# Altium PCB FE.PcbDoc
Units mm, origin at the board's own origin, x right, y up, seen from the top; angles counter-clockwise.
Board outline 43.2 x 52 mm, 4 copper layers (Layer 1, Layer 2, Layer 3, Layer 4), stack 1.641 mm thick; 117 components, 63 nets, 345 pads, 186 vias.
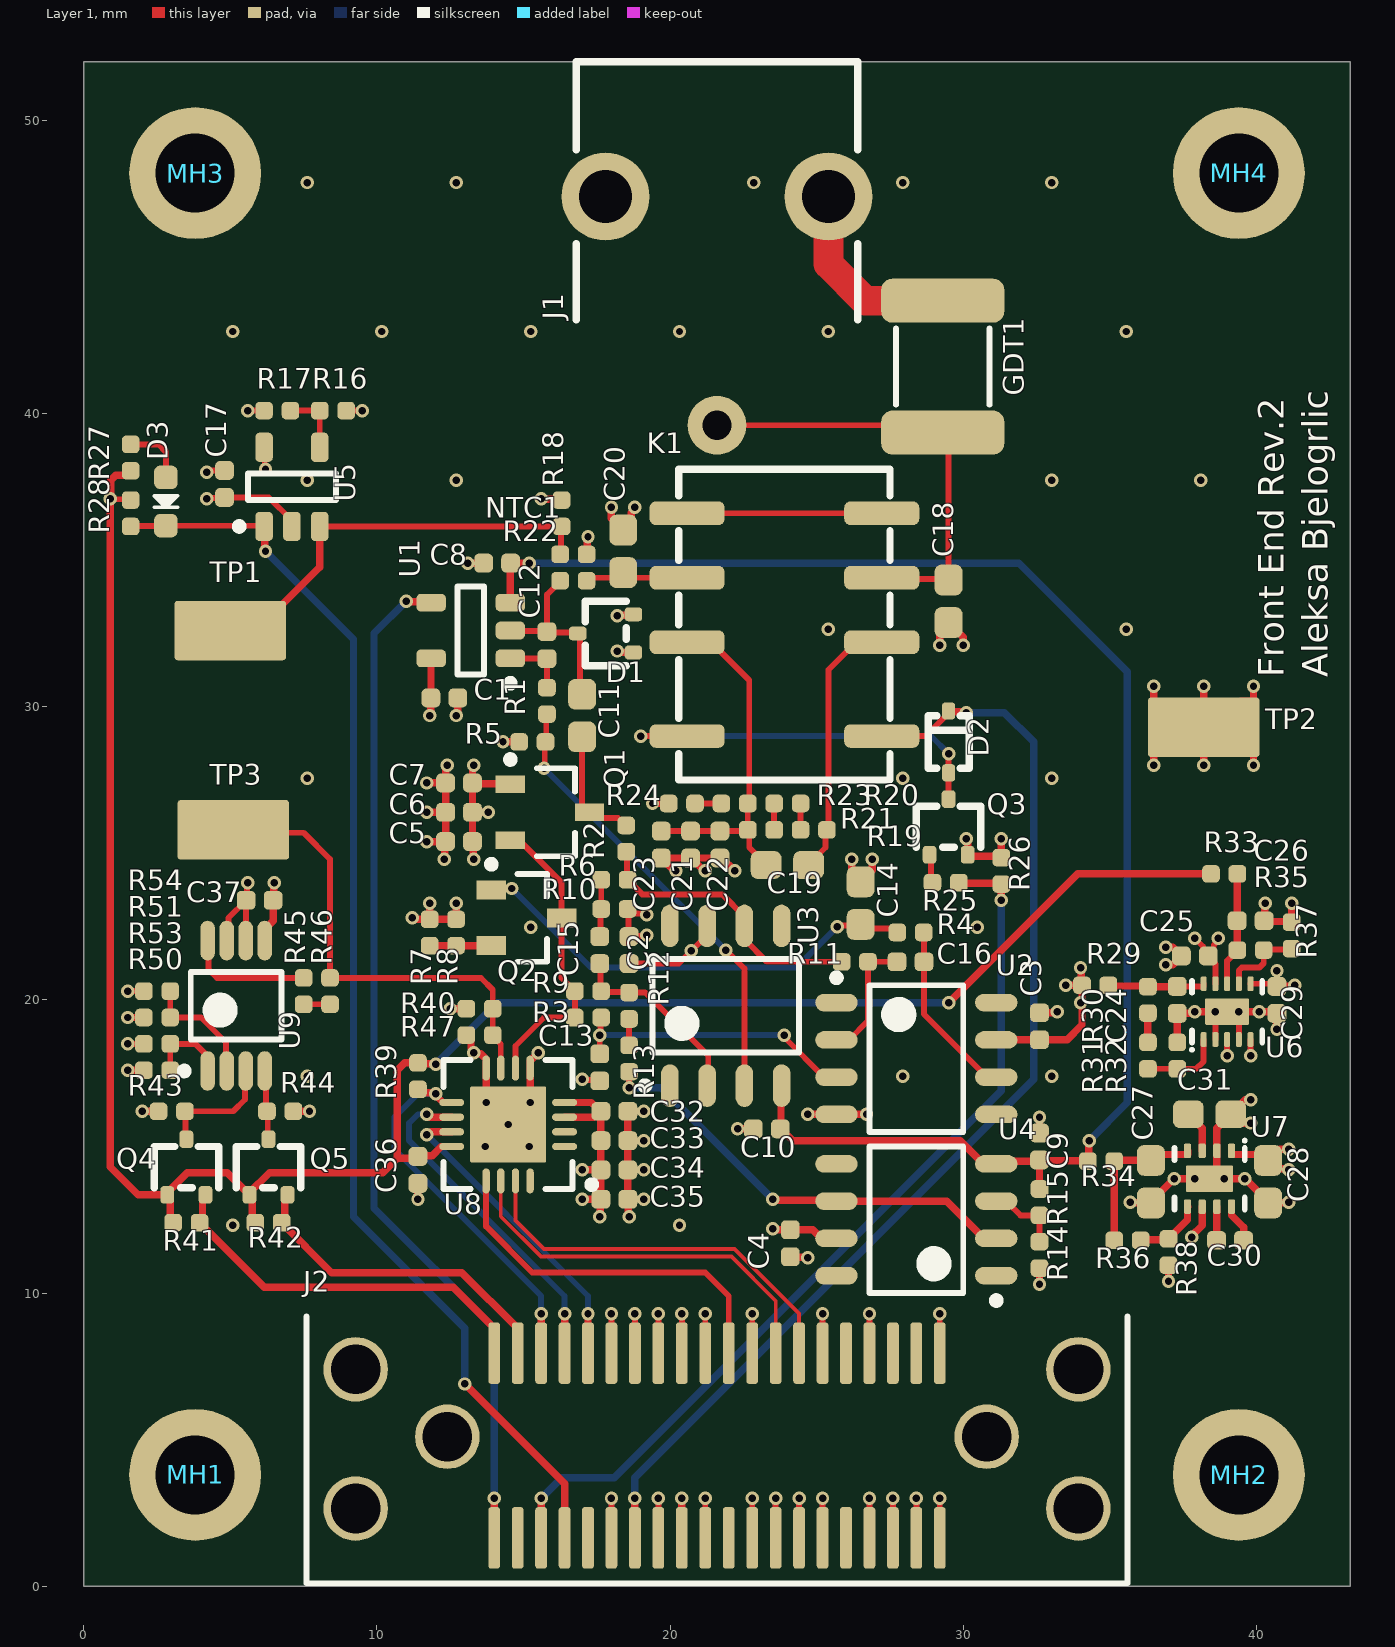
[diagram p0: Layer 1 view]
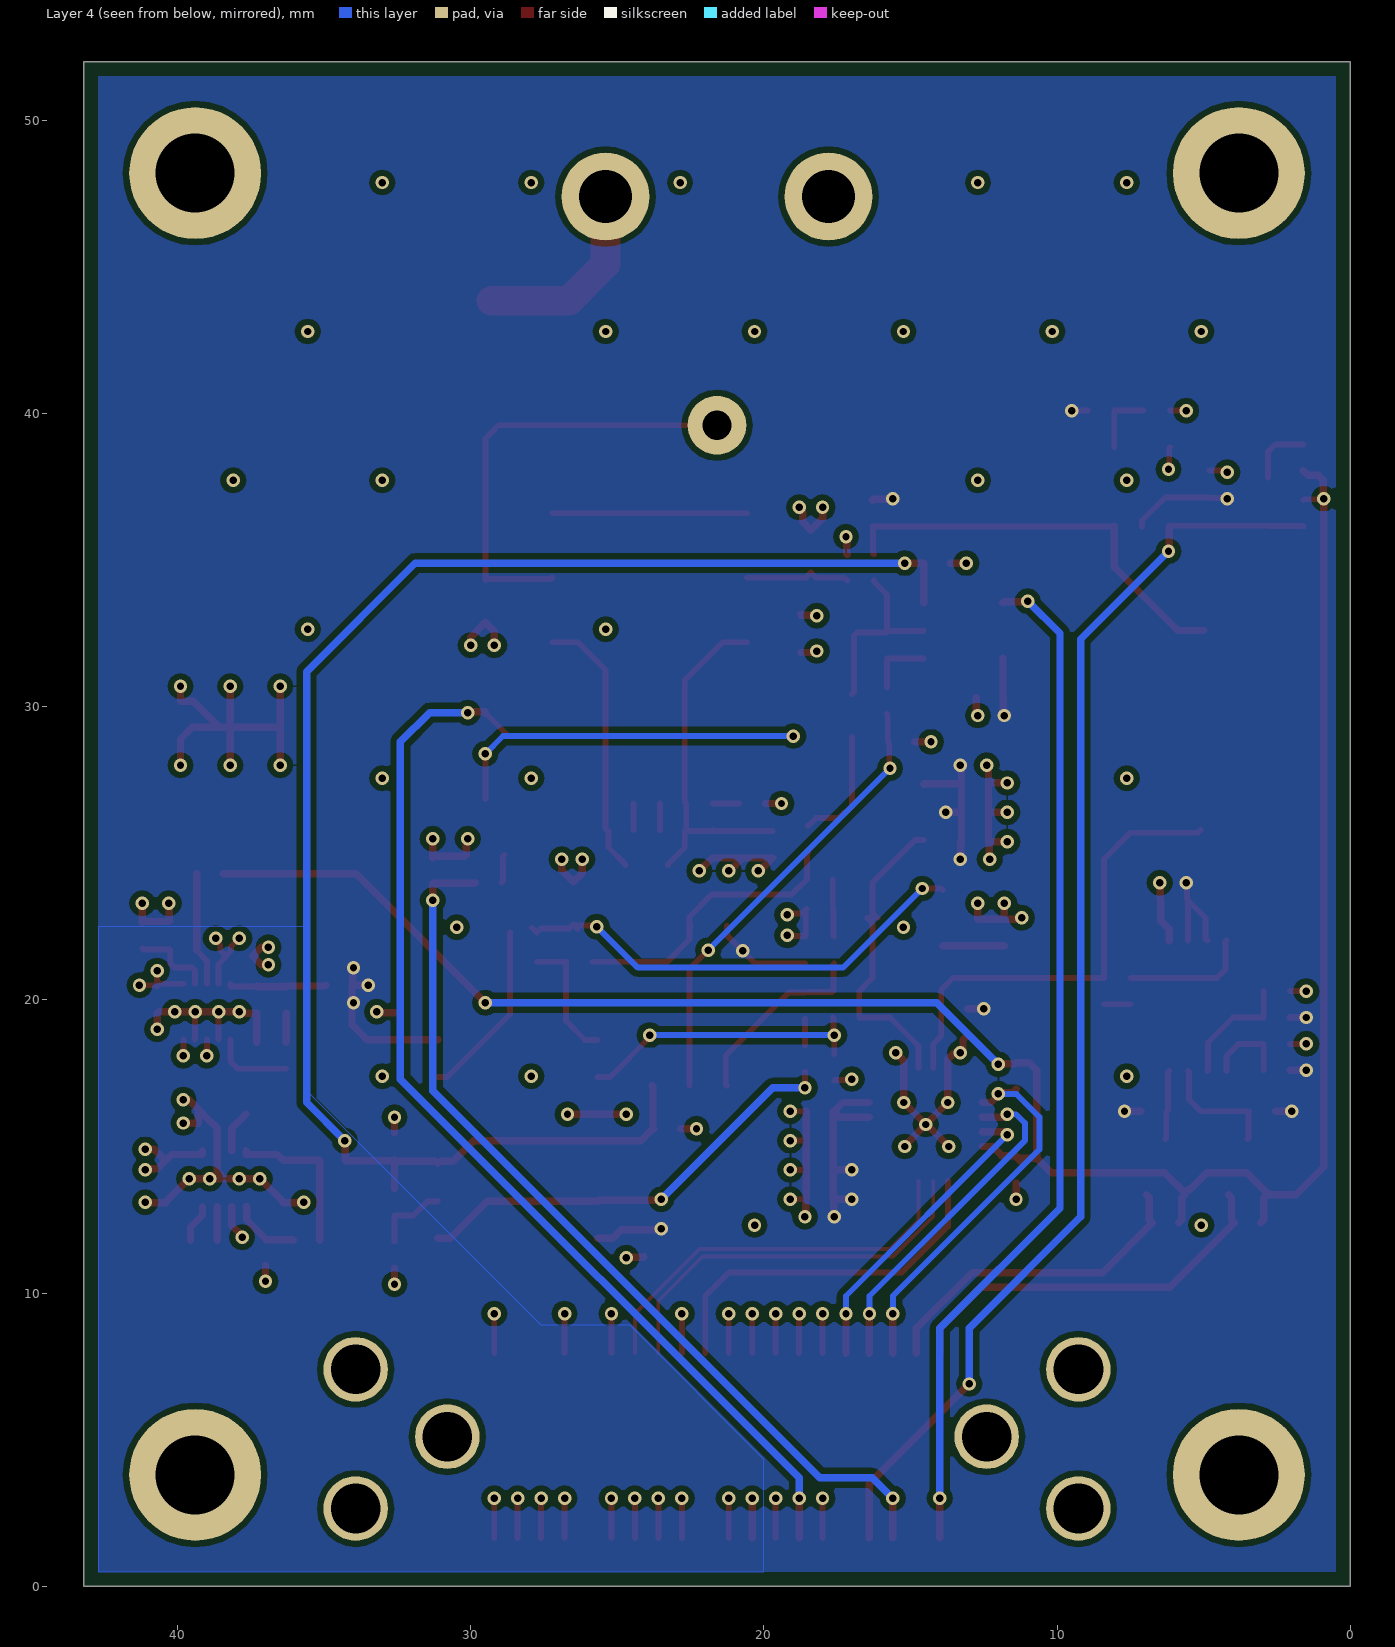
[diagram p1: Layer 4 view, seen from below]
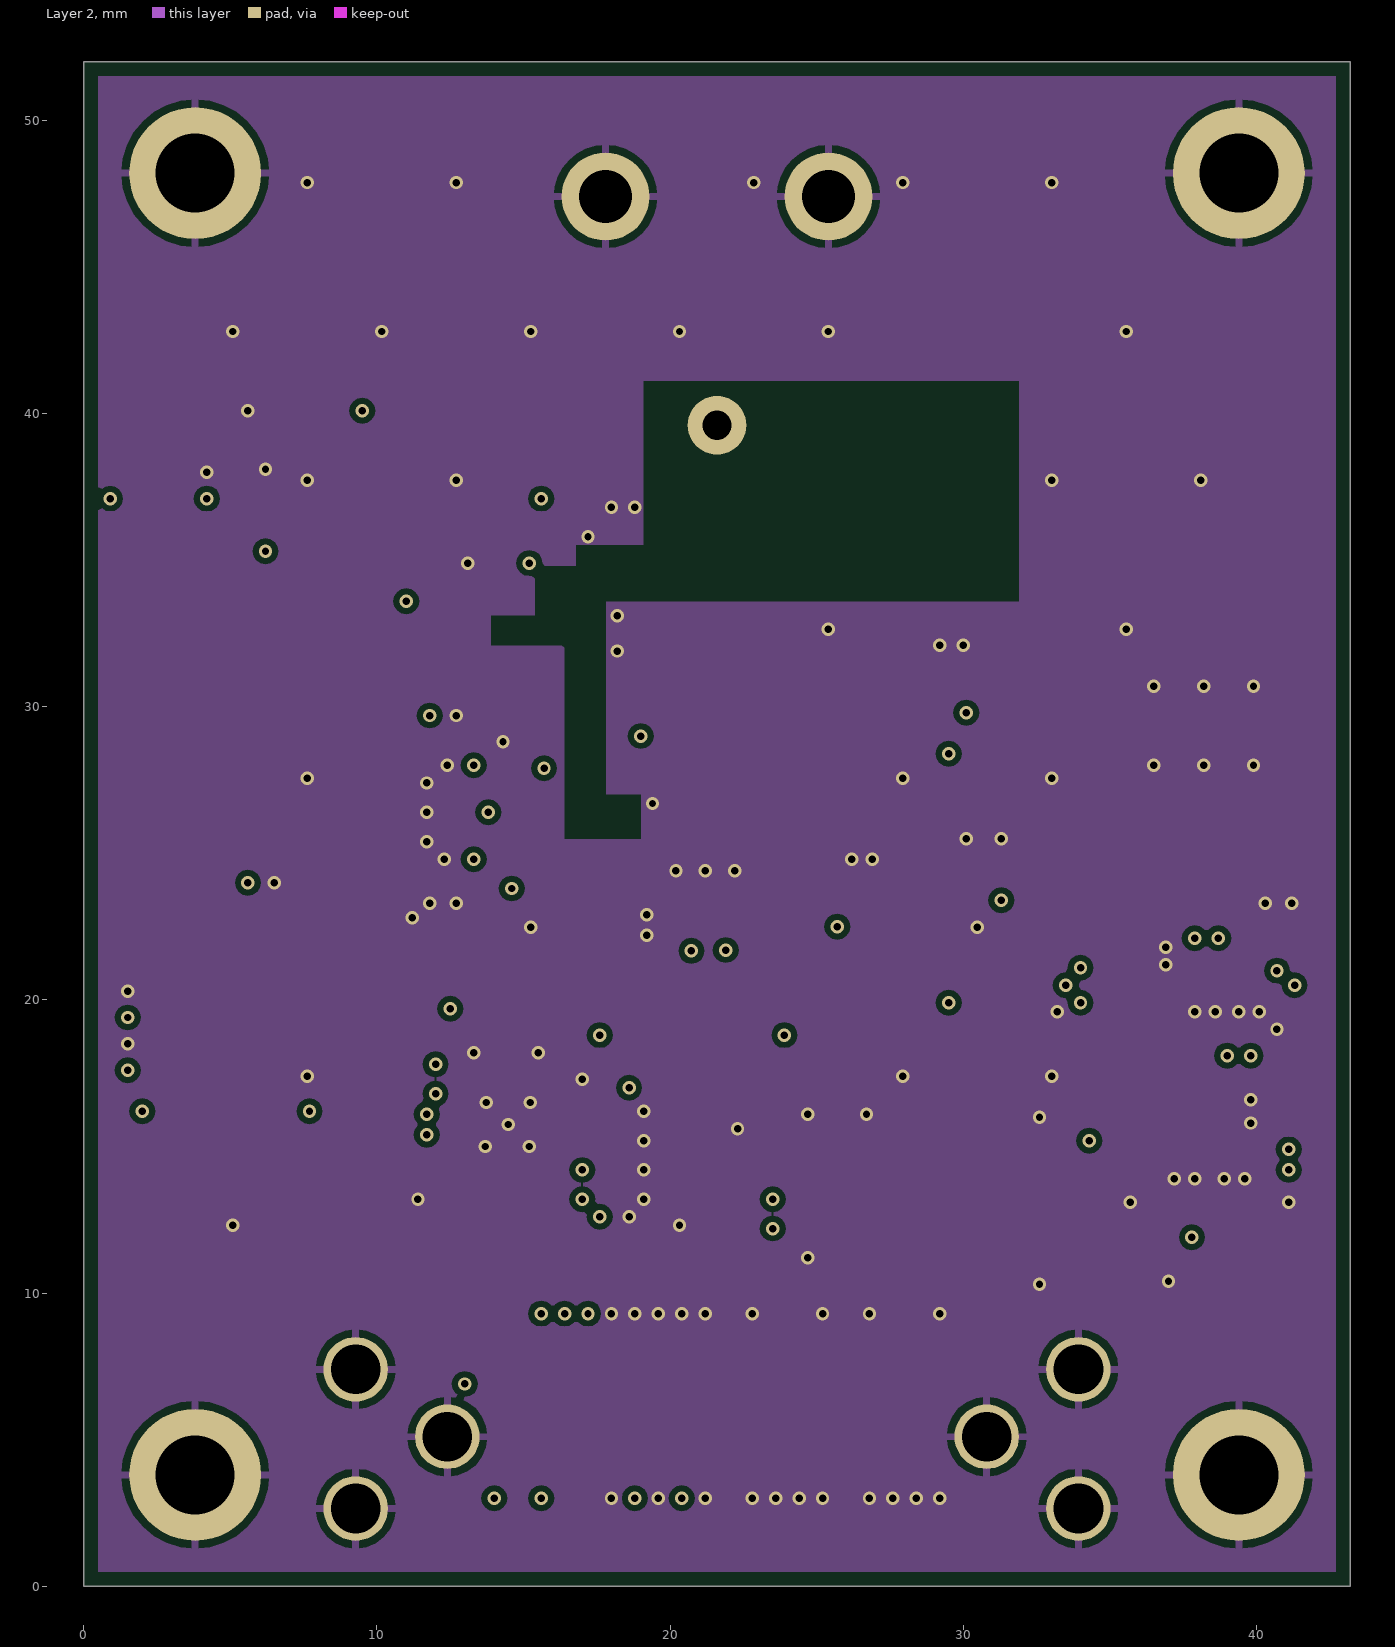
[diagram p2: Layer 2]
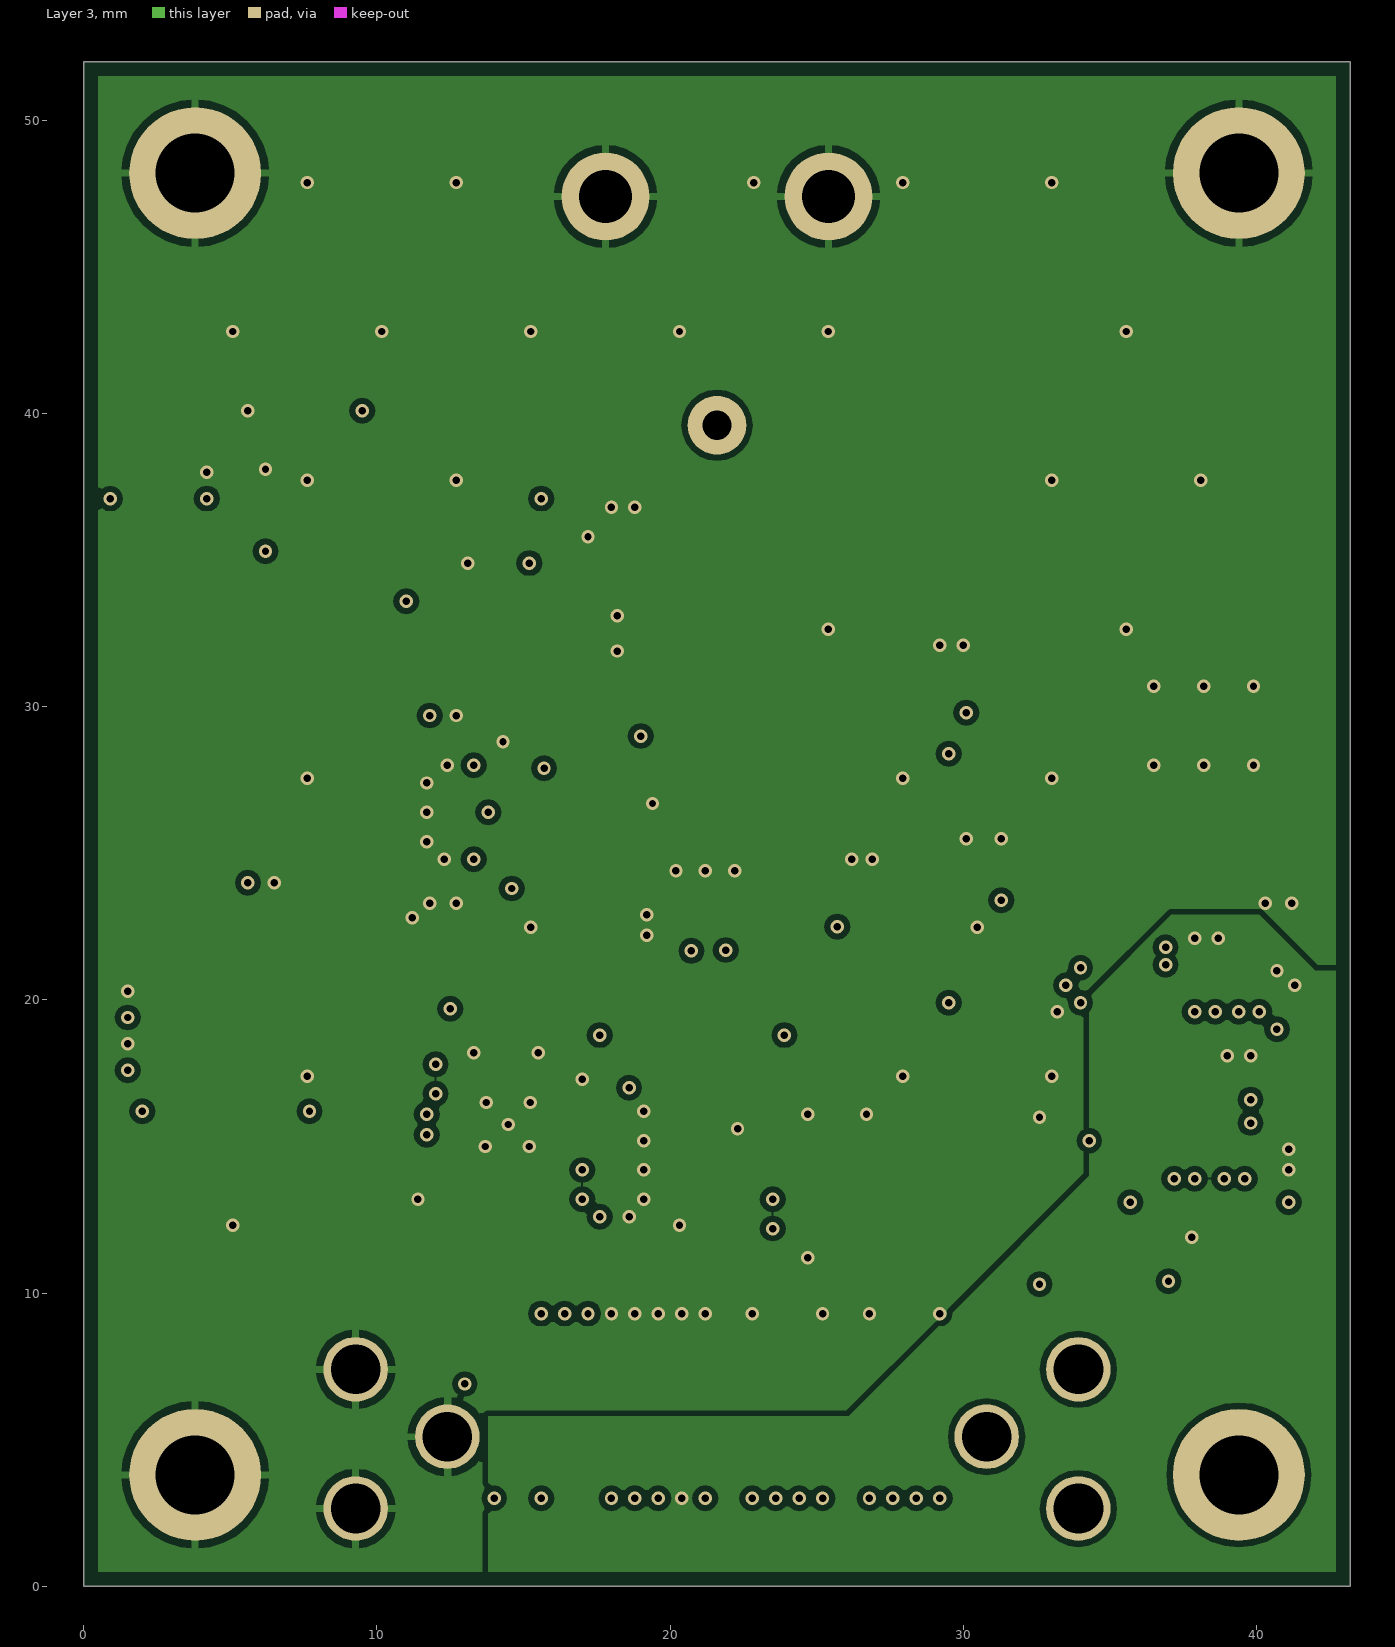
[diagram p3: Layer 3]
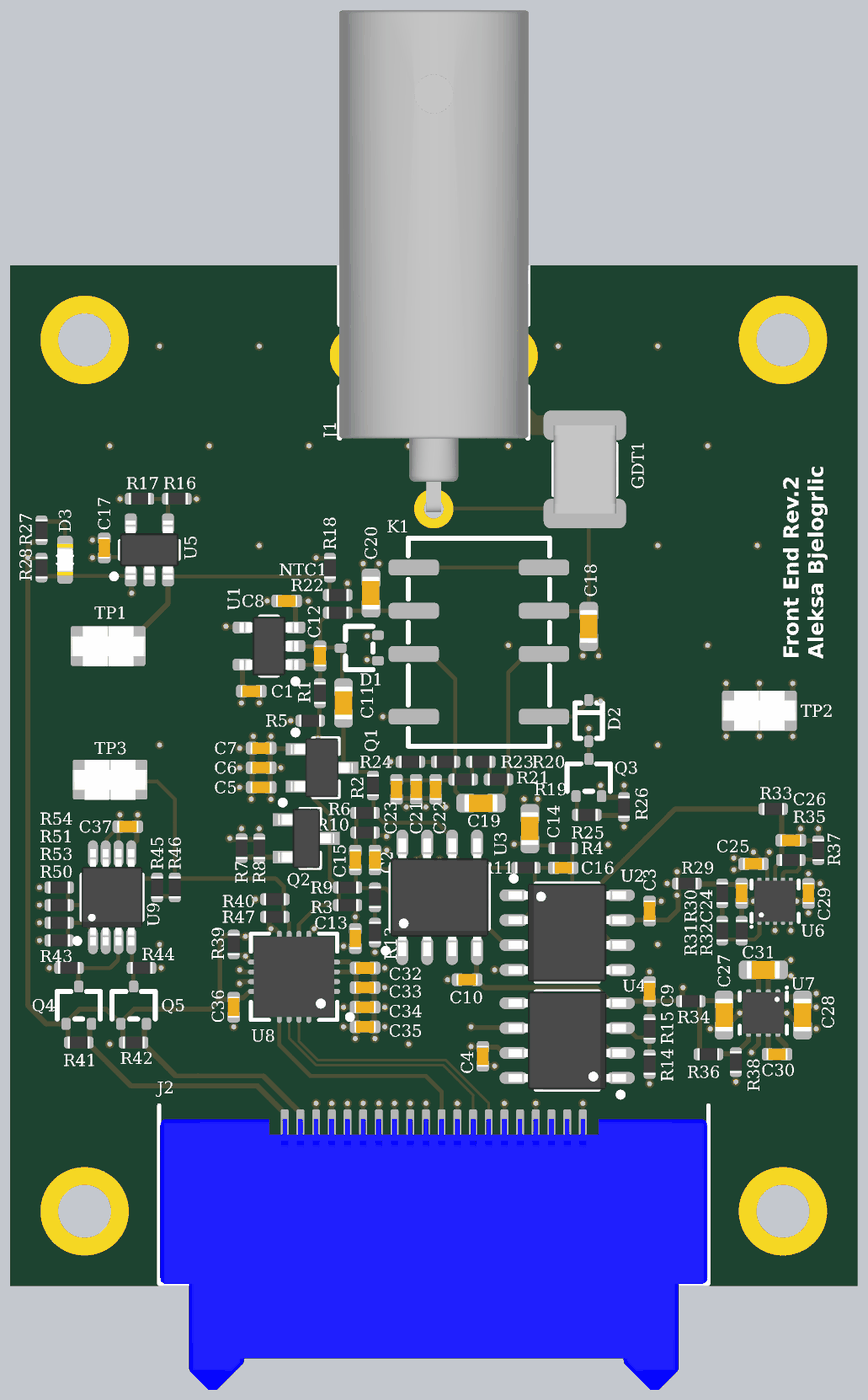
[diagram p4: 3D render of the assembled board from above, using the file's embedded part models]

## Layer stack, top to bottom
Top Solder: solder mask 0.0254, Solder Resist, Dk 3.5
Layer 1: signal copper 0.0356
Dielectric 2: prepreg 0.1702, FR-408, Dk 3.69
Layer 2: signal copper 0.0178
Dielectric 1: dielectric 1.1938, FR-408, Dk 3.69
Layer 3: signal copper 0.0178
Dielectric 3: prepreg 0.1702, FR-408, Dk 3.69
Layer 4: signal copper 0.0356
Bottom Solder: solder mask 0.0254, Solder Resist, Dk 3.5

## Board outline
0,0 43.2,0 43.2,52 0,52

## Design rules (kind name [scope] priority, off if disabled: settings)
Clearance [All] p1: gap=0.127 ignorepadtopadclearanceinfootprint=FALSE except(0.203: Arc-Poly Track-Poly SMDPad-Poly THPad-Poly Via-Poly Fill-Poly Poly-Poly)
HoleSize [All] p1: absolutevalues=TRUE maxlimit=3 minlimit=0.254 maxpercent=80.000 minpercent=20.000
MinimumAnnularRing [All] p1: minimumring=0.102
PolygonConnect [All] p1: thpad.connectstyle=Relief thpad.reliefconductorwidth=0.254 thpad.reliefentries=4 thpad.polygonreliefangle="90 Angle" thpad.airgapwidth=0.254 smdpad.connectstyle=Direct smdpad.reliefconductorwidth=0.254 smdpad.reliefentries=4 smdpad.polygonreliefangle="90 Angle" smdpad.airgapwidth=0.254 via.connectstyle=Direct via.reliefconductorwidth=0.254 via.reliefentries=4 via.polygonreliefangle="90 Angle" via.airgapwidth=0.254
RoutingVias [All] p1: holewidth=0.254 width=0.457 viastyle="Through Hole" minholewidth=0.254 minwidth=0.457 maxholewidth=0.254 maxwidth=0.457 useviatemplates=TRUE viatemplateguid#1={849A4061-242E-4D36-B728-FDEA95E12D9F} viatemplatename#1=v46h25m0mx0
SolderMaskExpansion [All] p1: expansion=0 istentingtop=FALSE
Width [All] p1: maxlimit=1.016 minlimit=0.127 preferedwidth=0.254
29 further rules are at their usual default settings.

## Classes and differential pairs
component class PGA: C32 C33 C34 C35 C36 C37 Q4 Q5 R39 R40 R41 R42 R43 R44 R45 R46 R47 R50 R51 R53 R54 TP3 U8 U9
component class Main: C24 C25 C26 C27 C28 C29 C30 C31 D3 J1 J2 MH1 MH2 MH3 MH4 R27 R28 R29 R30 R31 R32 R33 R34 R36 R37 R38 TP2 U6 U7
component class "Input Coupling and Attenuation": C17 C18 C19 C20 C21 C22 C23 D1 D2 GDT1 K1 NTC1 Q3 R16 R17 R18 R19 R20 R21 R23 R24 R26 TP1 U5
component class Buffer: C1 C3 C4 C5 C6 C7 C8 C10 C13 C14 C15 C16 Q1 Q2 R1 R2 R3 R5 R6 R7 R8 R9 R11 R12 R13 R14 R15 U2 U3 U4

## Components (designator, comment, footprint, x,y, rotation, side; value= is the part's Value field where it differs from the comment)
C1 "CAP 100nF 16V X7R 0402" GEN_C_0402 12.3,30.3 r0 top value=100nF
C2 "CAP 100nF 16V X7R 0402" GEN_C_0402 18.6,21.7 r90 top value=100nF
C3 "CAP 100nF 16V X7R 0402" GEN_C_0402 32.6,19.1 r90 top value=100nF
C4 "CAP 100nF 16V X7R 0402" GEN_C_0402 24.1,11.7 r270 top value=100nF
C5 "CAP 100nF 16V X7R 0402" GEN_C_0402 12.8,25.4 r180 top value=100nF
C6 "CAP 10nF 50V X7R 0402" GEN_C_0402 12.8,26.4 r0 top value=10nF
C7 "CAP 1nF 50V X7R 0402" GEN_C_0402 12.8,27.4 r0 top value=1nF
C8 "CAP 100nF 16V X7R 0402" GEN_C_0402 14.1,34.9 r180 top value=100nF
C9 "CAP 100nF 16V X7R 0402" GEN_C_0402 32.6,15 r90 top value=100nF
C10 "CAP 100nF 16V X7R 0402" GEN_C_0402 23.3,15.6 r180 top value=100nF
C11 "1.2nF" GEN_C_0603 17,29.7 r90 top
C12 "CAP 1uF 25V X5R 0402" GEN_C_0402 15.8,32.1 r90 top value=1uF
C13 "CAP 1uF 25V X5R 0402" GEN_C_0402 17.6,17.7 r90 top value=1uF
C14 "1.2nF" GEN_C_0603 26.5,23.3 r270 top
C15 "CAP 100nF 16V X7R 0402" GEN_C_0402 17.6,21.7 r270 top value=100nF
C16 "CAP 1uF 25V X5R 0402" GEN_C_0402 28.2,21.3 r0 top value=1uF
C17 "CAP 100nF 16V X7R 0402" GEN_C_0402 4.8,37.6 r90 top value=100nF
C18 "CAP 6pF 250V C0G 0603" GEN_C_0603 29.5,33.6 r90 top value=6pF
C19 "CAP 8pF 250V C0G 0603" GEN_C_0603 24,24.6 r0 top value=8pF
C20 "CAP 3pF 250V C0G 0603" GEN_C_0603 18.4,35.3 r90 top value=3pF
C21 "CAP 390pF 50V C0G 0402" GEN_C_0402 20.7,25.3 r90 top value=390pF
C22 "CAP 390pF 50V C0G 0402" GEN_C_0402 21.7,25.3 r90 top value=390pF
C23 "CAP DNP 0402" GEN_C_0402 19.7,25.3 r90 top value=DNP
C24 "CAP 2.2uF 10V X5R 0402" GEN_C_0402 37.3,20 r90 top value=2.2uF
C25 "CAP 2.2uF 10V X5R 0402" GEN_C_0402 37.9,21.5 r0 top value=2.2uF
C26 "CAP 2.2uF 10V X5R 0402" GEN_C_0402 39.8,22.7 r180 top value=2.2uF
C27 "CAP 10uF 10V X5R 0603" GEN_C_0603 36.4,13.8 r90 top value=10uF
C28 "CAP 10uF 10V X5R 0603" GEN_C_0603 40.4,13.8 r90 top value=10uF
C29 "CAP 2.2uF 10V X5R 0402" GEN_C_0402 40.7,20 r90 top value=2.2uF
C30 "CAP 1uF 25V X5R 0402" GEN_C_0402 39.1,11.8 r0 top value=1uF
C31 "CAP 10uF 10V X5R 0603" GEN_C_0603 38.4,16.1 r180 top value=10uF
C32 "CAP 1nF 50V X7R 0402" GEN_C_0402 18.1,16.2 r180 top value=1nF
C33 "CAP 10nF 50V X7R 0402" GEN_C_0402 18.1,15.2 r180 top value=10nF
C34 "CAP 100nF 16V X7R 0402" GEN_C_0402 18.1,14.2 r180 top value=100nF
C35 "CAP 1uF 25V X5R 0402" GEN_C_0402 18.1,13.2 r180 top value=1uF
C36 "CAP 100nF 16V X7R 0402" GEN_C_0402 11.4,14.2 r90 top value=100nF
C37 "CAP 100nF 16V X7R 0402" GEN_C_0402 6,23.4 r180 top value=100nF
D1 "DIODE ARRAY BAV99W" GEN_SOT_323 17.8,32.5 r90 top
D2 "DIODE 1N4148" GEN_SOD_323 29.5,28.8 r270 top
D3 "RED" LED_0603_APT1608 2.8,37 r90 top
GDT1 "GDT 90V" BOU_2051 29.3,41.6 r90 top
J1 "BNC" MOL_0731000105 21.6,43.5 r0 top
J2 "FX18-40P-0.8SH" HIR_FX18-40P-0.8SH 21.6,4.8 r0 top
K1 "RELAY DPDT-NO FTR-B3GA" FUJ_FTR-B3GA 23.9,32.8 r90 top
MH1 "M2.5" "MH M2.5" 3.8,3.8 r0 top
MH2 "M2.5" "MH M2.5" 39.4,3.8 r0 top
MH3 "M2.5" "MH M2.5" 3.8,48.2 r0 top
MH4 "M2.5" "MH M2.5" 39.4,48.2 r0 top
NTC1 "NTC 10K 3900K 0402" GEN_R_0402 16.7,35.2 r0 top value=10K
Q1 "NJFET CPH3910" ON_SOT23_CPH3 15.9,26.4 r0 top
Q2 "NPN MMBT3904" MMC_SOT23 15.1,22.8 r0 top
Q3 "NMOS DMN62D0UW" GEN_SOT_323 29.5,25.9 r0 top
Q4 "NMOS DMN62D0UW" GEN_SOT_323 3.5,14.3 r0 top
Q5 "NMOS DMN62D0UW" GEN_SOT_323 6.3,14.3 r0 top
R1 "RES 499K OHM 1% 1/10W 0402" GEN_R_0402 15.8,30.2 r90 top value=499K
R2 "RES 1M OHM 1% 1/10W 0402" GEN_R_0402 18.5,25.5 r90 top value=1M
R3 "RES 1M OHM 1% 1/10W 0402" GEN_R_0402 17.2,19.4 r0 top value=1M
R4 "RES 4.7K OHM 1% 1/10W 0402" GEN_R_0402 28.2,22.3 r0 top value=4.7K
R5 "RES 499K OHM 1% 1/10W 0402" GEN_R_0402 15.3,28.8 r0 top value=499K
R6 "RES 499K OHM 1% 1/10W 0402" GEN_R_0402 18.1,24.1 r0 top value=499K
R7 "RES 100 OHM 1% 1/10W 0402" GEN_R_0402 11.8,22.3 r270 top value=100
R8 "RES 100 OHM 1% 1/10W 0402" GEN_R_0402 12.7,22.3 r270 top value=100
R9 "RES 499K OHM 1% 1/10W 0402" GEN_R_0402 17.2,20.3 r180 top value=499K
R10 "RES 499K OHM 1% 1/10W 0402" GEN_R_0402 18.1,23.1 r180 top value=499K
R11 "RES 1M OHM 1% 1/10W 0402" GEN_R_0402 26.3,21.3 r0 top value=1M
R12 "RES 499K OHM 1% 1/10W 0402" GEN_R_0402 18.6,19.8 r90 top value=499K
R13 "RES 24K OHM 1% 1/10W 0402" GEN_R_0402 18.6,18 r90 top value=24K
R14 "RES 10K OHM 1% 1/10W 0402" GEN_R_0402 32.6,11.3 r270 top value=10K
R15 "RES 10K OHM 1% 1/10W 0402" GEN_R_0402 32.6,13.1 r270 top value=10K
R16 "RES 390K OHM 1% 1/10W 0402" GEN_R_0402 8.5,40.1 r180 top value=390K
R17 "RES 100K OHM 1% 1/10W 0402" GEN_R_0402 6.6,40.1 r180 top value=100k
R18 "RES 10K OHM 1% 1/10W 0402" GEN_R_0402 16.3,36.6 r90 top value=10K
R19 "RES 300K OHM 1% 1/10W 0402" GEN_R_0402 24.9,25.8 r180 top value=300K
R20 "RES 300K OHM 1% 1/10W 0402" GEN_R_0402 24,26.7 r180 top value=300K
R21 "RES 390K OHM 1% 1/10W 0402" GEN_R_0402 23.1,25.8 r180 top value=390K
R22 "49.9" GEN_R_0402 16.7,34.3 r180 top
R23 "RES 100 OHM 1% 1/10W 0402" GEN_R_0402 22.2,26.7 r0 top value=100
R24 "RES 10K OHM 1% 1/10W 0402" GEN_R_0402 20.4,26.7 r0 top value=10K
R25 "RES 10K OHM 1% 1/10W 0402" GEN_R_0402 29.4,24 r0 top value=10K
R26 "RES 10K OHM 1% 1/10W 0402" GEN_R_0402 31.3,24.4 r270 top value=10K
R27 "RES 1K OHM 1% 1/10W 0402" GEN_R_0402 1.6,38.5 r90 top value=1K
R28 "RES 10K OHM 1% 1/10W 0402" GEN_R_0402 1.6,36.6 r90 top value=10K
R29 "0.1" GEN_R_0402 34.5,20.5 r180 top
R30 "RES 300K OHM 1% 1/10W 0402" GEN_R_0402 36.3,20 r90 top value=300K
R31 "RES 499K OHM 1% 1/10W 0402" GEN_R_0402 36.3,18.1 r270 top value=499K
R32 "RES 100K OHM 1% 1/10W 0402" GEN_R_0402 37.3,18.1 r270 top value=100k
R33 "0.1" GEN_R_0402 38.9,24.3 r180 top
R34 "0.1" GEN_R_0402 34.7,14.5 r180 top
R35 "RES 499K OHM 1% 1/10W 0402" GEN_R_0402 39.8,21.7 r180 top value=499K
R36 "RES 300K OHM 1% 1/10W 0402" GEN_R_0402 35.6,11.8 r180 top value=300K
R37 "RES 100K OHM 1% 1/10W 0402" GEN_R_0402 41.2,22.2 r270 top value=100k
R38 "RES 100K OHM 1% 1/10W 0402" GEN_R_0402 37,11.4 r90 top value=100k
R39 "RES 10K OHM 1% 1/10W 0402" GEN_R_0402 11.4,17.4 r90 top value=10K
R40 "RES 100 OHM 1% 1/10W 0402" GEN_R_0402 13.5,19.7 r180 top value=100
R41 "RES 10K OHM 1% 1/10W 0402" GEN_R_0402 3.5,12.4 r180 top value=10K
R42 "RES 10K OHM 1% 1/10W 0402" GEN_R_0402 6.3,12.4 r180 top value=10K
R43 "RES 10K OHM 1% 1/10W 0402" GEN_R_0402 3,16.2 r180 top value=10K
R44 "RES 10K OHM 1% 1/10W 0402" GEN_R_0402 6.7,16.2 r0 top value=10K
R45 "RES 100 OHM 1% 1/10W 0402" GEN_R_0402 7.5,20.3 r90 top value=100
R46 "RES 100 OHM 1% 1/10W 0402" GEN_R_0402 8.4,20.3 r270 top value=100
R47 "RES 100 OHM 1% 1/10W 0402" GEN_R_0402 13.5,18.8 r0 top value=100
R50 "RES 10K OHM 1% 1/10W 0402" GEN_R_0402 2.5,17.6 r180 top value=10K
R51 "RES 10K OHM 1% 1/10W 0402" GEN_R_0402 2.5,19.4 r180 top value=10K
R53 "RES 10K OHM 1% 1/10W 0402" GEN_R_0402 2.5,18.5 r0 top value=10K
R54 "RES 10K OHM 1% 1/10W 0402" GEN_R_0402 2.5,20.3 r0 top value=10K
TP1 "5019" KEY_5019 5,32.6 r180 top
TP2 "5019" KEY_5019 38.2,29.3 r0 top
TP3 "5019" KEY_5019 5.1,25.8 r180 top
U1 "TS12A4516" GEN_SOT23_5_950_2900X1600X1450 13.2,32.6 r180 top
U2 "OP07CDR" TI_SOIC8_D0008A 28.4,18 r0 top
U3 "OP07CDR" TI_SOIC8_D0008A 21.9,19.8 r90 top
U4 "OP07CDR" TI_SOIC8_D0008A 28.4,12.5 r180 top
U5 "MIC7221" GEN_SOT23_5_950_2900X1600X1450 7.1,37.5 r90 top
U6 "TLV75201" TI_WSON10_DSQ0010A 39,19.6 r90 top
U7 "LM27761" TI_WSON8_DSG0008A 38.4,13.9 r270 top
U8 "LMH6518" TI_WQFN_RGH0016A 14.475,15.75 r180 top
U9 "IC DAC DAC101C085" TI_VSSOP8_DGK 5.2,19.8 r90 top

## Footprints (in the part's own frame and the unit in brackets; to place one, negate y for a bottom-side part, rotate by r counter-clockwise, add the part's x,y. Pads: shape width x height; smd on the part's side, far side on the other; paste and mask are expansions set on the pad)
BOU_2051 [mm]
  rrect50% 1.5x4.2 smd: 1(-2.25,0) 2(2.25,0)
  silkscreen extent -1.3,-1.6 1.3,1.6, body extent -2.25,-1.6 2.25,1.6, height 2.7
FUJ_FTR-B3GA [mm]
  rrect50% 0.8x2.56 smd: 1(-3.8,-3.32) 2(-0.6,-3.32) 3(1.6,-3.32) 4(3.8,-3.32) 5(3.8,3.32) 6(1.6,3.32) 7(-0.6,3.32) 8(-3.8,3.32)
  silkscreen extent -5.3,-3.6 5.3,3.6, body extent -5.43,-3.73 5.43,3.73, height 5.45
GEN_C_0402 [mm] "Chip Capacitor, 0402, IPC Medium Density"
  rrect50% 0.64x0.64 smd: 1(-0.46,0) 2(0.46,0)
  body extent -0.55,-0.3 0.55,0.3, height 0.6
GEN_C_0603 [mm] "Chip Capacitor, 2-Leads, Body 1.60x0.80mm, IPC Medium Density"
  rrect50% 1.05x0.95 smd: 1(-0.725,0) 2(0.725,0)
  body extent -0.85,-0.45 0.85,0.45, height 0.9
GEN_R_0402 [mm] "Chip Resistor, 2-Leads, Body 1.00x0.50mm, IPC Medium Density"
  rrect50% 0.6x0.6 smd: 1(-0.45,0) 2(0.45,0)
  body extent -0.55,-0.3 0.55,0.3, height 0.4
GEN_SOD_323 [mm]
  rrect50% 0.59x0.45 smd: 1(-1.055,0) 2(1.055,0)
  silkscreen extent -0.9,-0.7 0.9,0.7, body extent -1.03,-0.83 1.03,0.83, height 1.1
GEN_SOT23_5_950_2900X1600X1450 [mm] "SOT23, 5-Leads, Body 2.90x2.80mm, Pitch 0.95mm, IPC Medium Density"
  rrect50% 1x0.6 smd: 1(-1.35,0.95) 2(-1.35,0) 3(-1.35,-0.95) 4(1.35,-0.95) 5(1.35,0.95)
  silkscreen extent -1.48,-1.5 0.45,1.92, body extent -1.5,-1.5 1.5,1.5, height 1.45
GEN_SOT_323 [mm]
  rrect50% 0.47x0.6 smd: 1(0,0.95) 2(-0.65,-0.95) 3(0.65,-0.95)
  silkscreen extent -1.1,-0.7 1.1,0.7, body extent -1.23,-0.83 1.23,0.83, height 1.1
HIR_FX18-40P-0.8SH [mm]
  rrect50% 0.4x2.1 smd: 1(7.6,3.15) 2(6.8,3.15) 3(6,3.15) 4(5.2,3.15) 5(4.4,3.15) 6(3.6,3.15) 7(2.8,3.15) 8(2,3.15) 9(1.2,3.15) 10(0.4,3.15) 11(-0.4,3.15) 12(-1.2,3.15) 13(-2,3.15) 14(-2.8,3.15) 15(-3.6,3.15) 16(-4.4,3.15) 17(-5.2,3.15) 18(-6,3.15) 19(-6.8,3.15) 20(-7.6,3.15) 21(-7.6,-3.15) 22(-6.8,-3.15) 23(-6,-3.15) 24(-5.2,-3.15) 25(-4.4,-3.15) 26(-3.6,-3.15) 27(-2.8,-3.15) 28(-2,-3.15) 29(-1.2,-3.15) 30(-0.4,-3.15) 31(0.4,-3.15) 32(1.2,-3.15) 33(2,-3.15) 34(2.8,-3.15) 35(3.6,-3.15) 36(4.4,-3.15) 37(5.2,-3.15) 38(6,-3.15) 39(6.8,-3.15) 40(7.6,-3.15)
  round 2.2 hole 1.7: SHLD(-12.325,-2.15) SHLD(-12.325,2.6) SHLD(-9.2,0.3) SHLD(9.2,0.3) SHLD(12.325,-2.15) SHLD(12.325,2.6)
  silkscreen extent -14,-4.7 14,4.4, body extent -13.95,-10.1 13.95,3.7, height 9.48
KEY_5019 [mm] "PC TEST POINT MINIATURE"
  rrect10% 3.8x2.03 smd: 1(0,0)
  body extent -1.91,-1 1.91,1.03, height 2.29
LED_0603_APT1608 [mm]
  rrect50% 0.8x0.8 smd: 1(-0.825,0) 2(0.825,0)
  silkscreen extent -0.2,-0.4 0.2,0.4, body extent -0.81,-0.4 0.81,0.4, height 0.74
"MH M2.5" [mm]
  round 4.5 hole 2.7: 1(0,0)
MMC_SOT23 [mm] "SOT23, 3-Leads, Body 2.92x2.37mm, Pitch 0.95mm, Height 1.12mm, IPC Medium Density"
  rect 1x0.65 smd: 1(-1.2,0.95) 2(-1.2,-0.95) 3(1.2,0)
  silkscreen extent -1.32,-1.5 0.7,1.95, body extent -1.42,-1.52 1.42,1.52, height 1.12
MOL_0731000105 [mm] "Molex BNC Jack, TH Right Angle"
  round 2 hole 1: 1(0,-3.9)
  round 3 hole 1.8: 2(-3.8,3.9) 2(3.8,3.9)
  silkscreen extent -4.8,-0.3 4.8,8.5, body extent -4.83,-4.08 4.83,21.47, height 9.14
ON_SOT23_CPH3 [mm] "SOT23, 3-Leads, Body 2.90x2.80mm, Pitch 0.95mm, Height 0.95mm, IPC Medium Density"
  rect 1x0.6 smd: 1(-1.35,0.95) 2(-1.35,-0.95) 3(1.35,0)
  silkscreen extent -1.47,-1.5 0.85,1.92, body extent -1.58,-1.5 1.58,1.5, height 0.95
TI_SOIC8_D0008A [mm] "SOIC, 8-Leads, Body 4.91x3.90mm, Pitch 1.27mm, Height 1.75mm, IPC Medium Density"
  oval 1.45x0.6 smd: 1(-2.725,1.905) 2(-2.725,0.635) 3(-2.725,-0.635) 4(-2.725,-1.905) 5(2.725,-1.905) 6(2.725,-0.635) 7(2.725,0.635) 8(2.725,1.905)
  silkscreen extent -2.85,-2.5 1.6,2.88, body extent -3,-2.5 3,2.5, height 1.75
TI_VSSOP8_DGK [mm] "TSOP, 8-Leads, Body 3.00x3.00mm, Pitch 0.65mm, IPC Medium Density"
  oval 1.35x0.5 smd: 1(-2.225,0.975) 2(-2.225,0.325) 3(-2.225,-0.325) 4(-2.225,-0.975) 5(2.225,-0.975) 6(2.225,-0.325) 7(2.225,0.325) 8(2.225,0.975)
  silkscreen extent -2.35,-1.55 1.15,1.9, body extent -2.45,-1.55 2.45,1.55, height 1.1
TI_WQFN_RGH0016A [mm] "QFN, 16-Leads, Body 4.00x4.00mm, Pitch 0.50mm, Thermal Pad 2.60x2.60mm, IPC Medium Density"
  oval 0.85x0.25 smd: 1(-1.925,0.75) 2(-1.925,0.25) 3(-1.925,-0.25) 4(-1.925,-0.75) 9(1.925,-0.75) 10(1.925,-0.25) 11(1.925,0.25) 12(1.925,0.75)
  oval 0.25x0.85 smd: 5(-0.75,-1.925) 6(-0.25,-1.925) 7(0.25,-1.925) 8(0.75,-1.925) 13(0.75,1.925) 14(0.25,1.925) 15(-0.25,1.925) 16(-0.75,1.925)
  rrect5% 2.6x2.6 smd paste-1.3: 17(0,0)
  silkscreen extent -2.98,-2.2 2.2,2.2, body extent -2.05,-2.05 2.05,2.05, height 0.8
TI_WSON8_DSG0008A [mm] "SON, 8-Leads, Body 2.00x2.00mm, Pitch 0.50mm, Thermal Pad 1.60x0.69mm, IPC Medium Density"
  rrect50% 0.5x0.25 smd: 1(-0.95,0.75) 2(-0.95,0.25) 3(-0.95,-0.25) 4(-0.95,-0.75) 5(0.95,-0.75) 6(0.95,-0.25) 7(0.95,0.25) 8(0.95,0.75)
  rrect10% 0.9x1.6 smd paste-0.9: 9(0,0)
  silkscreen extent -1.35,-1.2 1.05,1.25, body extent -1.05,-1.05 1.05,1.05, height 0.8
TI_WSON10_DSQ0010A [mm] "SON, 10-Leads, Body 2.00x2.00mm, Pitch 0.40mm, Thermal Pad 1.50x0.69mm, IPC Medium Density"
  rrect50% 0.5x0.2 smd: 1(-0.95,0.8) 2(-0.95,0.4) 3(-0.95,0) 4(-0.95,-0.4) 5(-0.95,-0.8) 6(0.95,-0.8) 7(0.95,-0.4) 8(0.95,0) 9(0.95,0.4) 10(0.95,0.8)
  rrect10% 0.9x1.5 smd: 11(0,0)
  silkscreen extent -1.35,-1.2 1.05,1.25, body extent -1.05,-1.05 1.05,1.05, height 0.8

## Part data
C1 C2 C3 C4 C5 C8 C9 C10 C15 C17 C34 C36 C37: Package=0402, Supplier Part Number 1=490-4759-1-ND, Voltage Rating=16V, Supplier 1=Digi-Key
C6 C33: Package=0402, Supplier Part Number 1=490-4762-1-ND, Voltage Rating=50V, Supplier 1=Digi-Key
C7 C32: Package=0402, Supplier Part Number 1=490-4761-1-ND, Voltage Rating=50V, Supplier 1=Digi-Key
C11 C14: library part "CAP 1.2nF 50V C0G 0603", Package=0603, Supplier Part Number 1=490-1453-1-ND, Temperature Coefficient=C0G, Voltage Rating=50V, Supplier 1=Digi-Key
C12 C13 C16 C30 C35: Package=0402, Supplier Part Number 1=490-10017-1-ND, Voltage Rating=25V, Supplier 1=Digi-Key
C18: Package=0603, Supplier Part Number 1=399-8734-1-ND, Voltage Rating=250V, Supplier 1=Digi-Key
C19: Package=0603, Supplier Part Number 1=399-8740-1-ND, Voltage Rating=250V, Supplier 1=Digi-Key
C20: Package=0603, Supplier Part Number 1=399-8820-1-ND, Voltage Rating=250V, Supplier 1=Digi-Key
C21 C22: Package=0402, Supplier Part Number 1=490-8202-1-ND, Voltage Rating=50V, Supplier 1=Digi-Key
C23: Package=0402
C24 C25 C26 C29: Package=0402, Supplier Part Number 1=490-10451-1-ND, Voltage Rating=10V, Supplier 1=Digi-Key
C27 C28 C31: Package=0402, Supplier Part Number 1=490-10474-1-ND, Voltage Rating=10V, Supplier 1=Digi-Key
D1: Supplier Part Number 1=BAV99W-FDICT-ND, Supplier 1=Digi-Key
D2: Max Current=150mA, Max Reverse Voltage=75V, Supplier Part Number 1=1N4148WS-FDICT-ND, Supplier 1=Digi-Key
D3: library part "LED RED 0603 APT1608", Supplier Part Number 1=754-1930-1-ND, Supplier 1=Digi-Key
GDT1: Supplier Part Number 1=2051-09-SM-RPLFCT-ND, Supplier 1=Digi-Key
J1: library part "BNC JACK R/A", Supplier Part Number 1=WM5524-ND, Supplier 1=Digi-Key
J2: library part "CONN HDR FX18-40P-0.8SH", Supplier Part Number 1=H11868-ND, Supplier 1=Digi-Key
MH1 MH2 MH3 MH4: library part "MH M2.5"
NTC1: B Value=3900k, Package=0402, Supplier Part Number 1=P12985CT-ND, Supplier 1=Digi-Key
Q1: Supplier Part Number 1=CPH3910-TL-EOSCT-ND, Supplier 1=Digi-Key
Q2: Supplier Part Number 1=MMBT3904TPMSCT-ND, Supplier 1=Digi-Key
Q3 Q4 Q5: Max Power=320mW, Supplier Part Number 1=DMN62D0UW-7DICT-ND, Id=340mA, Supplier 1=Digi-Key, Vdss=60V
R1 R5 R6 R9 R10 R12 R31 R35: Package=0402, Power Rating=0.1W, Supplier Part Number 1=P499KLCT-ND, Tolerance=1%, Supplier 1=Digi-Key
R2 R3 R11: Package=0402, Power Rating=0.1W, Supplier Part Number 1=P1.00MLCT-ND, Tolerance=1%, Supplier 1=Digi-Key
R4: Package=0402, Power Rating=0.1W, Supplier Part Number 1=P4.70KLCT-ND, Tolerance=1%, Supplier 1=Digi-Key
R7 R8 R23 R40 R45 R46 R47: Package=0402, Power Rating=0.1W, Supplier Part Number 1=P100LCT-ND, Tolerance=1%, Supplier 1=Digi-Key
R13: Package=0402, Power Rating=0.1W, Supplier Part Number 1=P24.0KLCT-ND, Tolerance=1%, Supplier 1=Digi-Key
R14 R15 R18 R24 R25 R26 R28 R39 R41 R42 R43 R44 R50 R51 R53 R54: Package=0402, Power Rating=0.1W, Supplier Part Number 1=P10.0KLCT-ND, Tolerance=1%, Supplier 1=Digi-Key
R16 R21: Package=0402, Power Rating=0.1W, Supplier Part Number 1=P390KLCT-ND, Tolerance=1%, Supplier 1=Digi-Key
R17 R32 R37 R38: Package=0402, Power Rating=0.1W, Supplier Part Number 1=P100KLCT-ND, Tolerance=1%, Supplier 1=Digi-Key
R19 R20 R30 R36: Package=0402, Power Rating=0.1W, Supplier Part Number 1=P300KLCT-ND, Tolerance=1%, Supplier 1=Digi-Key
R22: library part "RES 49.9 OHM 1% 1/10W 0402", Package=0402, Power Rating=0.1W, Supplier Part Number 1=P49.9LCT-ND, Tolerance=1%, Supplier 1=Digi-Key
R27: Package=0402, Power Rating=0.1W, Supplier Part Number 1=P1.00KLCT-ND, Tolerance=1%, Supplier 1=Digi-Key
R29 R33 R34: library part "RES 0.1 OHM 1% 1/6W 0402", Package=0402, Power Rating=0.16W, Supplier Part Number 1=P.10AKCT-ND, Tolerance=1%, Supplier 1=Digi-Key
TP1 TP2 TP3: library part "TP KEYSTONE 5019", Supplier Part Number 1=36-5019CT-ND, Supplier 1=Digi-Key
U1: library part "IC SWITCH SPST TS12A4516DBVR", Supplier Part Number 1=296-24269-1-ND, Supplier 1=Digi-Key
U2 U3 U4: library part "IC OPAMP OP07CDR", Supplier Part Number 1=296-14626-1-ND, Supplier 1=Digi-Key
U5: library part "IC COMP MIC7221YM5", Supplier Part Number 1=576-2901-1-ND, Supplier 1=Digi-Key
U6: library part "IC LDO TLV75201", Supplier Part Number 1=296-TLV75201PDSQRCT-ND, Supplier 1=Digi-Key
U7: library part "IC CPUMP LM27761", Supplier Part Number 1=296-44379-1-ND, Supplier 1=Digi-Key
U8: library part "IC PGA LMH6518", Supplier Part Number 1=LMH6518SQE/NOPBCT-ND, Supplier 1=Digi-Key
U9: Supplier Part Number 1=DAC101C085CIMM/NOPBCT-ND, Supplier 1=Digi-Key

## Via types
v1: diameter 0.457, hole 0.254, Layer 1 to Layer 4, tented both sides, 186 vias

## Nets (pads, with @x,y where several pads share a name; then routed paths per layer and width w, separated by ;. In a path a pad name is that pad's centre, name@x,y a point inside that pad or via, vN(x,y) a via of type N, cw(c..) or ccw(c..) an arc to the next point about the centre after c; other vN are vias at no path point)
0dB_EN: J2.23 R25.2 R26.2 | length 31.3
  Layer 1 w0.254: J2.23 v1(15.6,3) ; R25.2 29.875,23.975 31.275,23.975 R26.2 v1(31.3,23.4)
  Layer 4 w0.254: v1(15.6,3) 16.3,3.7 18.1,3.7 31.3,16.9 v1(31.3,23.4)
+3V3: C36.2 Q4.2 Q5.2 R27.1 R28.2 R33.2 R39.2 R41.2 R42.2 U8.12 | length 74.2
  Layer 1 w0.2: v1(0.9,37.1) 0.925,37.075 1.575,37.075 R28.2
  Layer 1 w0.254: v1(0.9,37.1) 0.9,14.3 1.85,13.35 Q4.2 ; v1@0.925,37.075 0.925,37.725 1.091,37.891 1.441,37.891 R27.1 ; R41.2 2.95,12.5 2.95,13.25 Q4.2 ; R42.2 5.75,12.5 5.75,13.25 Q5.2 Q5.2@5.65,13.415 ; C36.2@11.24,14.5 C36.2@11.34,14.6 ; v1(12,17.8) 11.975,17.825 11.425,17.825 R39.2 10.95,17.85 10.7,17.6 10.7,14.6 ; U8.12 12.2,15 11.88,14.68 11.42,14.68 C36.2 C36.2@11.34,14.6 ; v1(29.5,19.9) 33.9,24.3 R33.2 ; Q4.2 2.85,13.415 3.535,14.1 4.9,14.1 5.477,13.523 5.542,13.523 Q5.2@5.65,13.415 ; Q5.2@5.65,13.415 6.335,14.1 10.2,14.1 10.7,14.6 ; 10.7,14.6 C36.2@11.34,14.6
  Layer 4 w0.254: v1(12,17.8) 14.105,19.905 v1@29.5,19.905
+5V: C1.1 C2.1 C3.1 C4.1 C5.1 C6.2 C7.2 C17.1 C32.2 C33.2 C34.2 C35.2 C37.2 Q1.1 R16.1 R18.2 R29.2 R40.2 R43.2 R44.2 R50.2 R51.2 U1.5 U2.7 U3.7 U4.7 U5.2 U8.3 U8.4 U9.6 U9.7 | length 37.1
  Layer 1 w0.2: v1(4.2,37.1) 4.22,37.12 4.78,37.12 C17.1 6.31,37.14 7.1,36.35 U5.2 ; U9.7 4.932,22.082 4.932,22.792 C37.2@5.533,23.393 ; U9.6 5.533,22.032 C37.2@5.533,23.393 ; v1(5.6,24) 5.57,23.97 5.57,23.43 C37.2 C37.2@5.533,23.393 ; R16.1 v1(9.5,40.1) ; C2.1 20.296,21.24 v1(20.728,21.672) 21.265,22.209 U3.7
  Layer 1 w0.254: v1(1.5,17.6) R50.2 ; v1(1.5,19.4) R51.2 ; v1(2,16.2) R43.2 ; R44.2 v1(7.7,16.2) ; v1(11.8,29.7) 11.84,29.74 C1.1 11.845,30.305 11.845,31.645 U1.5 ; v1(12.5,19.7) R40.2 ; v1(13.3,24.8) 13.28,24.82 13.28,25.38 C5.1 C6.2 ; v1(13.3,28) 13.26,27.96 C7.2 ; v1(13.8,26.4) C6.2 ; Q1.1 14.525,27.375 13.285,27.375 C7.2 ; v1(15.6,37.1) 15.625,37.075 16.275,37.075 R18.2 ; U8.3 17.408,16 C32.2@17.608,16.2 ; U8.4 17.308,16.5 C32.2@17.608,16.2 ; v1(17,13.2) C35.2 ; v1(17,14.2) C34.2 ; v1(17.6,12.6) 17.62,12.62 17.62,13.18 C35.2 ; v1(23.5,12.2) 23.54,12.16 C4.1 24.861,12.16 25.156,11.865 U4.7 ; U2.7 31.127,18.637 32.598,18.637 C3.1 33.54,18.64 34.05,19.15 v1@34.05,19.95 ; v1(33.5,20.5) R29.2 ; v1(34,19.9) v1@34.05,19.95 ; v1(34,21.1) 34.025,21.075 34.025,20.525 R29.2 ; C6.2 C7.2 ; C32.2@17.608,16.2 C32.2 C33.2 C34.2 ; C35.2 C34.2 ; v1@34.05,19.95 R29.2
+5V5: C25.2 C28.2 C29.2 J2.29 U6.3 U6.5 U6.6 U6.9 U7.1 U7.6 | length 11.5
  Layer 1 w0.2: v1(37.9,22.1) 38.177,21.823 38.177,21.683 C25.2 ; U6.9 38.6,21.228 38.36,21.468 C25.2 ; v1(38.7,22.1) 38.7,22.03 38.543,21.873 38.543,21.683 C25.2 ; v1(39,18.1) U6.3 ; v1(39.8,18.1) U6.5 ; U6.6 40.61,20.55 C29.2 ; v1(40.7,21) C29.2 ; v1(41.3,20.5) 40.74,20.5 C29.2
  Layer 1 w0.254: J2.29 v1(20.4,3) ; v1(37.8,11.9) 37.8,11.955 38.15,12.305 U7.6 ; U7.1 39.15,14.729 39.152,14.727 40.198,14.727 C28.2 ; v1(41.1,14.2) 41.061,14.239 40.686,14.239 C28.2 ; v1(41.1,14.9) 40.8,14.9 40.425,14.525 C28.2
+VUSB: D2.1 J2.27 K1.1 | length 38.8
  Layer 1 w0.2: K1.1 28.715,29 29.5,29.785 D2.1
  Layer 1 w0.254: J2.27 v1(18.8,3) ; D2.1@29.5,29.785 29.542,29.827 30.073,29.827 v1(30.1,29.8)
  Layer 4 w0.254: v1(18.8,3) 18.8,3.7 32.4,17.3 32.4,28.8 31.4,29.8 v1(30.1,29.8)
-5V: C8.1 C9.1 C10.1 R15.1 R34.2 U1.3 U3.4 U4.4 | length 54.7
  Layer 1 w0.2: C10.1 C10.1@23.782,15.622 ; U4.4@31.03,14.5 U4.4 U4.4@31.22,14.5 ; C9.1@32.56,14.5 C9.1
  Layer 1 w0.254: U1.3 14.555,33.555 14.555,34.895 C8.1 v1(15.2,34.9) ; C10.1 23.792,15.6 24.192,15.2 29.9,15.2 30.6,14.5 U4.4@31.03,14.5 ; C10.1@23.782,15.622 23.782,17.052 U3.4 ; U4.4@31.22,14.5 C9.1@32.56,14.5 ; R15.1 C9.1 32.62,14.52 34.23,14.52 R34.2 34.275,14.525 34.275,15.175 v1(34.3,15.2)
  Layer 4 w0.254: v1(15.2,34.9) 31.9,34.9 35.6,31.2 35.6,16.5 v1(34.3,15.2)
DC_CPL: J2.21 U1.4 | length 35
  Layer 1 w0.254: v1(11,33.6) 11.025,33.575 11.825,33.575 U1.4 ; J2.21 v1(14,3)
  Layer 4 w0.254: v1(11,33.6) 9.9,32.5 9.9,12.9 14,8.8 v1(14,3)
GND: C1.2 C2.2 C3.2 C4.2 C5.2 C6.1 C7.1 C8.2 C9.2 C10.2 C13.1 C14.1 C17.2 C18.1 C20.2 C21.1 C22.1 C23.1 C24.1 C25.1 C26.1 C27.1 C28.1 C29.1 C31.1 C32.1 C33.1 C34.1 C35.1 C36.1 C37.1 D1.2 D1.3 GDT1.2 J1.2 J2.1 J2.4 J2.6 J2.9 J2.11 J2.12 J2.13 J2.14 J2.15 J2.26 J2.28 J2.30 J2.32 J2.33 J2.34 J2.35 J2.37 J2.38 J2.39 J2.40 J2.SHLD MH1.1 MH2.1 MH3.1 MH4.1 NTC1.2 Q3.3 R5.1 R7.1 R8.1 R10.1 R14.2 R17.2 R24.1 R26.1 R32.1 R37.1 R38.1 R47.1 R53.1 R54.1 TP2.1 U2.4 U5.5 U6.2 U6.4 U6.11 U7.2 U7.9 U8.5 U8.8 U8.17 U9.5 | length 120
  Layer 1 w0.2: v1(1.5,18.5) R53.1 ; v1(1.5,20.3) R54.1 ; v1(4.2,38) 4.26,38.06 C17.2 ; v1(5.6,40.1) R17.2 ; U5.5 6.175,38.825 6.175,38.125 v1(6.2,38.1) ; v1(17,17.3) 17.03,17.27 17.57,17.27 C13.1 ; J2.26 v1(18,3) ; J2.15 v1(18,9.3) ; R10.1 R10.1@18.575,23.075 ; C35.1 v1(19.1,13.2) ; C34.1 v1(19.1,14.2) ; C33.1 v1(19.1,15.2) ; C32.1 v1(19.1,16.2) ; J2.14 v1(18.8,9.3) ; v1(19.2,22.2) 19.18,22.18 18.62,22.18 C2.2 18.575,22.185 R10.1@18.575,23.075 ; v1(19.2,22.9) 19.151,22.949 18.701,22.949 R10.1@18.575,23.075 ; J2.28 v1(19.6,3) ; J2.13 v1(19.6,9.3) ; J2.12 v1(20.4,9.3) ; J2.30 v1(21.2,3) ; J2.11 v1(21.2,9.3) ; J2.32 v1(22.8,3) ; J2.9 v1(22.8,9.3) ; J2.33 v1(23.6,3) ; J2.34 v1(24.4,3) ; J2.35 v1(25.2,3) ; J2.6 v1(25.2,9.3) ; J2.37 v1(26.8,3) ; J2.4 v1(26.8,9.3) ; J2.38 v1(27.6,3) ; J2.39 v1(28.4,3) ; J2.40 v1(29.2,3) ; J2.1 v1(29.2,9.3) ; U6.2 v1(38.6,19.6) ; U6.4 v1(39.4,19.6)
  Layer 1 w0.254: U9.5 6.175,22.414 6.46,22.699 C37.1 6.48,23.42 6.48,23.98 v1(6.5,24) ; v1(11.2,22.8) 11.25,22.75 R7.1 ; v1(11.4,13.2) C36.1 ; v1(11.7,25.4) C5.2 ; v1(11.7,26.4) C6.1 ; v1(11.7,27.4) C7.1 ; v1(11.8,23.3) R7.1 ; v1(12.3,24.8) 12.32,24.82 12.32,25.38 C5.2 ; v1(12.4,28) 12.34,27.94 C7.1 ; v1(12.7,23.3) R8.1 R7.1 ; v1(12.7,29.7) 12.76,29.76 C1.2 ; R47.1 13.209,18.641 13.209,18.346 v1@13.3,18.255 ; v1(13.1,34.9) C8.2 ; v1(13.3,18.2) v1@13.3,18.255 ; v1(13.7,15) 14.45,15.75 v1(14.475,15.75) ; v1(14.3,28.8) R5.1 ; v1(15.2,15) 15.2,15.025 v1(14.475,15.75) ; v1(15.5,18.2) 15.225,17.925 U8.5 v1(15.225,16.5) v1(14.475,15.75) ; NTC1.2 17.175,35.225 17.175,35.775 v1(17.2,35.8) ; v1(18,36.8) 18,36.425 C20.2 18.68,36.305 18.68,36.625 18.8,36.745 v1(18.8,36.8) ; v1(18.2,31.9) 18.25,31.85 D1.2 ; v1(18.2,33.1) 18.225,33.125 18.725,33.125 D1.3 ; C32.1 C33.1 C34.1 C35.1 18.58,13.18 18.58,12.62 v1(18.6,12.6) ; v1(19.4,26.7) R24.1 ; v1(20.2,24.4) 20.14,24.4 C23.1 C21.1 C21.1@20.718,24.84 ; v1(21.2,24.4) 21.158,24.4 C21.1@20.718,24.84 ; v1(22.2,24.4) 21.76,24.84 C22.1 C21.1@20.718,24.84 ; v1(22.3,15.6) C10.2 ; C4.2 24.12,11.22 24.68,11.22 v1(24.7,11.2) ; v1(24.7,16.1) 24.702,16.098 25.672,16.098 U2.4 25.68,16.1 v1(26.7,16.1) ; v1(26.2,24.8) 26.2,24.325 C14.1 26.9,24.425 v1(26.9,24.8) ; v1(29.2,32.1) 29.2,32.575 C18.1 30,32.375 v1(30,32.1) ; v1(30.1,25.5) 30.15,25.45 Q3.3 30.2,24.9 31.25,24.9 R26.1 v1(31.3,25.5) ; v1(32.6,10.3) R14.2 ; C9.2 v1(32.6,16) ; C3.2 33.16,19.56 v1(33.2,19.6) ; v1(35.7,13.1) 35.713,13.087 36.387,13.087 C27.1 36.4,13.112 37.188,13.9 v1(37.2,13.9) v1(37.9,13.9) ; v1(36.5,28) TP2.1@36.5,29.3 ; v1(36.5,30.7) TP2.1@36.5,29.3 ; v1(36.9,21.2) 37.14,21.2 C25.1 37.14,21.8 v1(36.9,21.8) ; v1(37,10.4) R38.1 ; R32.1 C24.1 37.84,19.54 v1(37.9,19.6) v1(38.6,19.6) U6.11 v1(39.4,19.6) v1(40.1,19.6) 40.64,19.6 C29.1 v1(40.7,19) ; v1(38.2,28) TP2.1 ; v1(38.2,30.7) TP2.1 ; C31.1@39.3,16.1 39.3,15.8 v1(39.8,15.8) ; v1(39.8,16.6) 39.625,16.6 C31.1 39.125,16.09 38.65,15.615 U7.2 38.65,14.15 U7.9 ; v1(39.9,28) 39.9,28.9 39.5,29.3 TP2.1@38.581,29.3 ; v1(39.9,30.7) 39.9,30.188 39.469,30.188 TP2.1@38.581,29.3 ; v1(40.3,23.3) 40.28,23.28 40.28,22.72 C26.1 40.285,22.675 41.175,22.675 R37.1 v1(41.2,23.3) ; v1(41.1,13.1) 41.075,13.075 C28.1 40.4,13.112 39.612,13.9 v1(39.6,13.9) v1(38.9,13.9) ; C5.2 C6.1 ; C6.1 C7.1 ; v1@13.3,18.255 13.394,18.161 13.535,18.161 13.725,17.971 U8.8 v1(13.725,16.5) v1(14.475,15.75) ; TP2.1@36.5,29.3 TP2.1 ; v1(37.9,13.9) U7.9 ; v1(37.9,13.9) U7.9 ; TP2.1 TP2.1@38.581,29.3 ; U7.9 v1(38.9,13.9) ; U7.9 v1(38.9,13.9)
  Layer 1 w1.016: J1.2@25.4,47.4 25.4,45.1 26.65,43.85 GDT1.2
  other v1: 5.08,12.32 20.32,12.32 7.62,17.4 27.94,17.4 33.02,17.4 15.24,22.48 30.48,22.48 7.62,27.56 27.94,27.56 33.02,27.56 25.4,32.64 35.56,32.64 7.62,37.72 12.7,37.72 33.02,37.72 38.1,37.72 5.08,42.8 10.16,42.8 15.24,42.8 20.32,42.8 25.4,42.8 35.56,42.8 7.62,47.88 12.7,47.88 22.86,47.88 27.94,47.88 33.02,47.88
NetC11_1: C11.1 Q1.3 R2.2 | length 4.1
  Layer 1 w0.2: C11.1 17,26.6 17.2,26.4 Q1.3 17.45,26.2 18.223,26.2 18.473,25.95 R2.2
NetC11_2: C11.2 C12.2 D1.1 R22.2 U1.2 | length 6.4
  Layer 1 w0.2: U1.2 14.57,32.58 15.78,32.58 C12.2 ; R22.2 16.25,34.273 15.8,33.823 C12.2 ; C11.2 16.925,30.5 16.925,32.425 D1.1 16.82,32.53 15.83,32.53 C12.2
NetC12_1: C12.1 R1.2 U1.1 | length 2.2
  Layer 1 w0.2: U1.1 14.555,31.645 15.795,31.645 C12.1 R1.2
NetC13_2: C13.2 R3.2 U2.3 | length 10
  Layer 1 w0.2: C13.2 v1(17.6,18.8) 17.625,18.825 17.625,19.375 R3.2 ; v1(23.9,18.8) 23.9,18.715 25.25,17.365 U2.3
  Layer 4 w0.2: v1(17.6,18.8) v1(23.9,18.8)
NetC14_2: C14.2 Q2.1 R4.1 | length 16.1
  Layer 1 w0.2: Q2.1 13.95,23.8 v1(14.6,23.8) ; v1(25.7,22.5) 25.737,22.538 C14.2@26.463,22.538 ; C14.2@26.349,22.424 C14.2@26.463,22.538 ; C14.2@26.663,22.412 C14.2@26.637,22.438 ; R4.1@27.912,22.463 R4.1 27.613,22.438 C14.2@26.637,22.438 ; C14.2@26.463,22.538 C14.2 C14.2@26.637,22.438
  Layer 4 w0.2: v1(14.6,23.8) 17.3,21.1 24.3,21.1 v1(25.7,22.5)
NetC15_1: C15.1 R6.1 R10.2 | length 2
  Layer 1 w0.2: C15.1 17.625,22.185 17.625,23.075 R10.2 R6.1
NetC15_2: C15.2 R9.1 R12.2 U3.2 | length 6.6
  Layer 1 w0.2: C15.2 17.625,21.215 17.625,20.325 R9.1 17.675,20.275 18.575,20.275 R12.2 19.15,20.25 21.3,18.1 21.3,17.11 U3.2
NetC16_1: C16.1 R11.2 U2.2 | length 4.3
  Layer 1 w0.2: U2.2 26.1,18.635 26.75,19.285 R11.2 C16.1
NetC16_2: C16.2 R4.2 U2.6 | length 6.1
  Layer 1 w0.2: R4.2 28.655,22.295 28.655,21.305 C16.2 28.66,19.514 30.809,17.365 U2.6
NetC18_2: C18.2 GDT1.1 J1.1 K1.3 | length 15.2
  Layer 1 w0.2: J1.1 29.05,39.6 GDT1.1 29.5,39.15 C18.2 29.462,34.362 27.258,34.362 K1.3
NetC19_1: C19.1 C21.2 C22.2 C23.2 K1.7 R21.2 R23.2 | length 12.3
  Layer 1 w0.2: C23.2 C21.2 C22.2 ; K1.7 21.406,32.2 22.7,30.906 22.7,26.75 R23.2 R21.2 ; C22.2@21.74,25.8 C22.2 ; C19.1 23.275,24.624 22.699,25.2 22.699,25.751 R21.2 ; C22.2 22.61,25.76 R21.2
NetC19_2: C19.2 K1.2 R19.1 | length 9.1
  Layer 1 w0.2: C19.2 24.725,24.624 25.301,25.2 25.301,25.751 R19.1 25.4,25.85 25.4,31.26 26.34,32.2 K1.2
NetC20_1: C20.1 K1.6 R22.1 | length 3.6
  Layer 1 w0.2: R22.1 17.25,34.4 18.225,34.4 C20.1 18.575,34.4 K1.6
NetC24_2: C24.2 R29.1 R30.2 U6.10 | length 3.4
  Layer 1 w0.2: C24.2 38.2,20.46 U6.10
  Layer 1 w0.254: R29.1 34.975,20.475 36.275,20.475 R30.2 36.305,20.455 37.295,20.455 C24.2
NetC26_2: C26.2 R33.1 R35.2 U6.8 | length 3.9
  Layer 1 w0.2: U6.8 39,21.338 R35.2@39.35,21.688
  Layer 1 w0.254: R35.2@39.35,21.688 R35.2 39.345,21.705 39.345,22.695 C26.2 39.345,22.705 39.345,24.295 R33.1
NetC27_2: C27.2 R34.1 R36.2 U7.4 | length 5.4
  Layer 1 w0.254: R36.2 R34.1 35.175,14.525 C27.2 36.602,14.727 37.648,14.727 37.65,14.729 U7.4
NetC30_1: C30.1 U7.7 | length 1.2
  Layer 1 w0.254: C30.1 38.648,11.808 38.648,12.948 U7.7
NetC30_2: C30.2 U7.8 | length 1.3
  Layer 1 w0.254: U7.8 39.15,12.65 39.56,12.24 C30.2
NetC31_2: C31.2 U7.3 | length 1.4
  Layer 1 w0.254: C31.2 37.675,16.09 38.15,15.615 U7.3
NetD2_2: D2.2 K1.8 Q3.1 | length 13.9
  Layer 1 w0.2: v1(19,29) K1.8 ; Q3.1 D2.2 v1(29.5,28.4)
  Layer 4 w0.2: v1(19,29) 28.9,29 v1(29.5,28.4)
NetD3_2: D3.2 R27.2 | length 2.2
  Layer 1 w0.2: R27.2 2.55,38.95 2.8,38.7 D3.2
NetK1_4: K1.4 K1.5 | length 6.6
  Layer 1 w0.2: K1.5 K1.4
NetNTC1_1: NTC1.1 R18.1 TP1.1 U5.3 | length 14.6
  Layer 1 w0.2: U5.3 R18.1 16.275,36.125 16.275,35.225 NTC1.1
  Layer 1 w0.254: TP1.1 5.885,32.6 8.05,34.765 U5.3
NetQ1_2: Q1.2 Q2.3 R3.1 R9.2 U8.6 | length 10.8
  Layer 1 w0.2: Q1.2 14.85,25.45 16.3,24 16.3,22.975 16.125,22.8 Q2.3 16.475,22.8 16.3,22.625 16.3,20.75 R9.2 R3.1 15.7,19.4 14.725,18.425 U8.6
NetQ2_2: Q2.2 R7.2 R8.2 | length 2.1
  Layer 1 w0.254: R7.2 R8.2 Q2.2
NetQ3_2: Q3.2 R25.1 | length 1
  Layer 1 w0.2: Q3.2 28.9,24.9 28.9,24.05 R25.1
NetQ4_1: Q4.1 R43.1 U9.3 | length 4.2
  Layer 1 w0.2: Q4.1 3.475,15.275 3.475,16.175 R43.1 5.1,16.2 5.5,16.6 5.5,17.55 U9.3
NetQ5_1: Q5.1 R44.1 U9.4 | length 2.4
  Layer 1 w0.2: U9.4 6.213,17.538 6.213,16.237 R44.1 6.275,16.175 6.275,15.275 Q5.1
NetR1_1: R1.1 R5.2 U3.3 | length 15.5
  Layer 1 w0.2: v1(15.7,27.9) 15.725,27.925 15.725,28.775 R5.2 15.775,28.825 15.775,29.725 R1.1 ; v1(21.9,21.7) 22.535,21.065 U3.3
  Layer 4 w0.2: v1(15.7,27.9) v1(21.9,21.7)
NetR2_1: R2.1 R6.2 R11.1 U3.6 | length 9.9
  Layer 1 w0.2: R2.1 18.525,25.025 18.525,24.125 R6.2 19.05,23.6 21.776,23.6 22.535,22.841 U3.6 ; U3.6@22.5,22.49 U3.6 ; R11.1 23.3,21.3 22.535,22.065 U3.6
NetR12_1: R12.1 R13.2 | length 0.9
  Layer 1 w0.2: R13.2 R12.1
NetR13_1: R13.1 U4.2 U4.6 | length 15.2
  Layer 1 w0.2: v1(18.6,17) R13.1
  Layer 1 w0.254: v1(23.5,13.2) 23.533,13.167 25.642,13.167 U4.6 29.43,13.135 30.7,11.865 U4.2
  Layer 4 w0.254: v1(18.6,17) 19.7,17 v1(23.5,13.2)
NetR14_1: R14.1 R15.2 U4.3 | length 2.6
  Layer 1 w0.2: U4.3 31.142,13.118 31.482,13.118 31.95,12.65 R15.2 R14.1
NetR16_2: R16.2 R17.1 U5.4 | length 2.3
  Layer 1 w0.2: R17.1 R16.2 U5.4
NetR19_2: R19.2 R20.1 | length 0.9
  Layer 1 w0.2: R19.2 R20.1
NetR20_2: R20.2 R21.1 | length 0.9
  Layer 1 w0.2: R21.1 R20.2
NetR23_1: R23.1 R24.2 | length 0.9
  Layer 1 w0.2: R24.2 R23.1
NetR30_1: R30.1 R31.1 | length 1
  Layer 1 w0.254: R31.1 R30.1
NetR31_2: R31.2 R32.2 U6.1 | length 2.8
  Layer 1 w0.2: R31.2 R32.2 37.95,17.65 38.2,17.9 U6.1
NetR35_1: R35.1 R37.2 U6.7 | length 2.8
  Layer 1 w0.2: U6.7 39.4,21 39.5,21.1 40.1,21.1 40.25,21.25 R35.1 40.275,21.725 41.175,21.725 R37.2
NetR36_1: R36.1 R38.2 U7.5 | length 2.3
  Layer 1 w0.254: R36.1 36.075,11.825 36.975,11.825 R38.2 37.648,12.498 37.648,12.948 U7.5
NetR40_1: R40.1 R46.1 R47.2 TP3.1 U8.7 | length 16.3
  Layer 1 w0.2: TP3.1 5.2,25.7 7.5,25.7 8.4,24.8 R46.1 13.55,20.75 13.95,20.35 R40.1 R47.2 13.95,18.773 14.225,18.498 U8.7
NetR45_1: R45.1 R46.2 | length 0.9
  Layer 1 w0.2: R45.1 R46.2
NetR45_2: R45.2 U9.8 | length 4.4
  Layer 1 w0.2: U9.8 4.25,22 4.25,21.05 4.55,20.75 R45.2
NetR50_1: R50.1 R53.2 U9.1 | length 2.9
  Layer 1 w0.2: R50.1 R53.2 3.8,18.5 4.225,18.075 U9.1
NetR51_1: R51.1 R54.2 U9.2 | length 4.1
  Layer 1 w0.2: R54.2 R51.1 4,19.4 4.85,18.55 4.85,17.6 U9.2
OUT_N: J2.8 U8.14 | length 13.6
  Layer 1 w0.127: U8.14 14.225,12.616 15.595,11.246 22.095,11.246 23.6,9.741 J2.8
OUT_P: J2.7 U8.15 | length 13.7
  Layer 1 w0.127: U8.15 14.725,12.475 15.7,11.5 22.2,11.5 24.4,9.3 J2.7
PGA_CSn: J2.18 R39.1 U8.9 | length 13.2
  Layer 1 w0.254: R39.1 11.511,16.839 11.915,16.839 v1@12,16.754 ; v1(12,16.8) v1@12,16.754 ; U8.9 12.254,16.5 v1@12,16.754 ; J2.18 v1(15.6,9.3)
  Layer 4 w0.203: v1(12,16.8) 11.99,16.79 11.39,16.79 10.6,16 10.6,14.9 15.6,9.9 v1(15.6,9.3)
PGA_SCLK: J2.16 U8.11 | length 10.6
  Layer 1 w0.254: v1(11.7,15.4) 11.755,15.4 11.853,15.498 12.548,15.498 U8.11 ; J2.16 v1(17.2,9.3)
  Layer 4 w0.203: v1(11.7,15.4) 17.2,9.9 v1(17.2,9.3)
PGA_SDIO: J2.17 U8.10 | length 11.7
  Layer 1 w0.254: v1(11.7,16.1) 11.8,16 U8.10 ; J2.17 v1(16.4,9.3)
  Layer 4 w0.203: v1(11.7,16.1) 11.4,16.1 11.1,15.8 11.1,15.2 16.4,9.9 v1(16.4,9.3)
THERMn: D3.1 J2.24 R28.1 U5.1 | length 43.3
  Layer 1 w0.2: R28.1 1.612,36.162 2.787,36.162 D3.1 6.125,36.175 U5.1
  Layer 1 w0.254: U5.1 6.175,36.125 6.175,35.325 v1(6.2,35.3) ; v1(13,6.9) 16.4,3.5 J2.24
  Layer 4 w0.254: v1(6.2,35.3) 9.2,32.3 9.2,12.6 13,8.8 v1(13,6.9)
TRIMDAC_SCL: J2.20 Q4.3 R41.1 | length 13.4
  Layer 1 w0.254: Q4.3 4.05,13.25 4.05,12.5 R41.1 6.15,10.2 12.6,10.2 14,8.8 J2.20
TRIMDAC_SDA: J2.19 Q5.3 R42.1 | length 11.4
  Layer 1 w0.254: Q5.3 6.85,13.25 6.85,12.5 R42.1 8.45,10.7 12.9,10.7 14.8,8.8 J2.19
VCM: J2.10 U8.13 | length 12.8
  Layer 1 w0.2: U8.13 13.725,12.275 15.3,10.7 21.2,10.7 22,9.9 J2.10
pads on no net: J2.2 J2.3 J2.5 J2.22 J2.25 J2.31 J2.36 U2.1 U2.5 U2.8 U3.1 U3.5 U3.8 U4.1 U4.5 U4.8 U8.1 U8.2 U8.16

## Polygon pours and split planes (outlines as drawn)
GND on Layer 2 "Layer 2-No Net 1" (solid, pour order 12): 0.5,51.5 42.7,51.5 42.7,0.5 0.5,0.5
GND on Layer 2 "Layer 2-No Net" (solid, pour order 0): 0.5,51.5 42.7,51.5 42.7,0.5 0.5,0.5
+5V on Layer 4 "Layer 4-No Net" (solid, pour order 20): 0.5,51.5 42.7,51.5 42.7,0.5 0.5,0.5
+5V5 on Layer 4 "Layer 4-No Net 2" (solid, pour order 16): 35.5,22.5 42.7,22.5 42.7,0.5 20,0.5 20,4.34 24.56,8.9 27.6,8.9 35.5,16.8
+5V on Layer 4 "+5V_L04_P006" (solid, remove dead copper, pour order 6): 0.5,51.5 42.7,51.5 42.7,0.5 0.5,0.5
GND on Layer 3 "Layer 3-No Net 2" (solid, pour order 14): 0.5,51.5 42.7,51.5 42.7,0.5 0.5,0.5
GND on Layer 3 "Layer 3-No Net" (solid, pour order 10): 0.5,51.5 42.7,51.5 42.7,0.5 0.5,0.5
+5V5 on Layer 3 "Layer 3-No Net 1" (solid, pour order 8): 13.8,0.5 13.8,5.8 26.1,5.8 34.3,14 34.3,20.2 34.4,20.2 37.1,22.9 40.1,22.9 42,21 42.7,21 42.7,0.5

## Other copper
Layer 2:
  pour cut-out: 19.1,41.1 19.1,35.5 16.8,35.5 16.8,34.8 15.4,34.8 15.4,33.1 13.9,33.1 13.9,32.1 16.4,32.1 16.4,25.5 19,25.5 19,27 17.8,27 17.8,33.6 31.9,33.6 31.9,41.1

## Silkscreen, mask and mechanical layers (free items; w line width, h text height)
Top Overlay:
  text "Front End Rev.2 / Aleksa Bjelogrlic" at 42.719,31 h1.5 r90
Mechanical 1:
  the board outline again, w0.05
Mechanical 13:
  lines w0.1: 10.4,9.2 10.4,52 ; 33,9.2 33,52